# Altium PCB ESP32 WITH USB C PCB V111.PcbDoc (part 2 of 3)
Units mil, origin at the board's own origin, x right, y up, seen from the top; angles counter-clockwise.
Board outline 2735 x 1100 mil, 4 copper layers (L1, L2, L3, L4), stack 54.293 mil thick; 64 components, 73 nets, 299 pads, 176 vias.
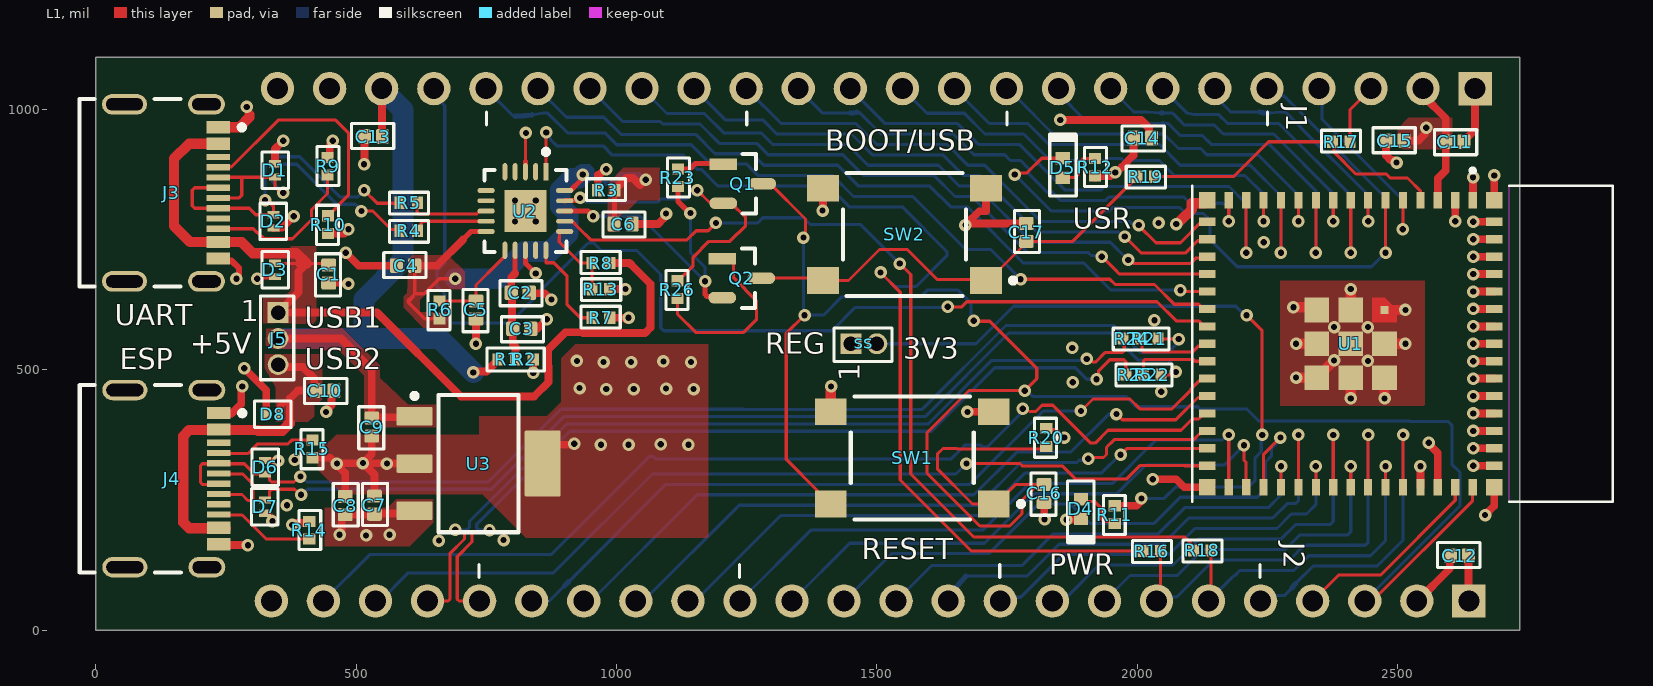
[diagram p0: L1 view]

## Via types
v1: diameter 24, hole 12, L1 to L4, tented both sides, 176 vias

## Nets (pads, with @x,y where several pads share a name; then routed paths per layer and width w, separated by ;. In a path a pad name is that pad's centre, name@x,y a point inside that pad or via, vN(x,y) a via of type N, cw(c..) or ccw(c..) an arc to the next point about the centre after c; other vN are vias at no path point) (continued)
+5V_VBUS1: C1.2 D3.1 J3.A4B9 J3.B4A9 J5.1 R8.2 | length 1786.1
  L1 w6: D3.1@344.61,704.19 390,704.19 ; 405,704.19 C1.2@444.14,704.19
  L1 w15: 390,704.19 405,704.19 389.18,688.37 389.18,649.18 J5.1@350,610 540,610 701,449 841.93,449 869.5,476.57 869.5,506.22 868.13,507.59 868.13,538.21 901.92,572 933.88,572 935.38,570.5 1054.71,570.5 1065,580.79 1065,665 1035,695 1025,705 R8.2@986.93,705 ; C1.2@444.14,704.19 C1.2@447,701.32
  L1 w20: J3.A4B9@235.59,934.41 J3.A4B9@235.12,934.41 179.41,934.41 150,905 150,776.72 181.28,745.43 J3.B4A9@235.12,745.43 279.87,745.43 301.3,724 305,724 385.19,724 405,704.19
+5V_VBUS2: C10.2 D8.1 J4.A4B9 J4.B4A9 J5.3 | length 706.7
  L1 w12: D8.1@352.8,415 353.69,415.89 353.69,430.21 360.71,437.24 372.36,437.24
  L1 w15: J5.3@350,510 354.78,505.22 397.78,505.22 419.47,483.53 419.47,463.21 C10.2@422.68,460 387.72,460 372.36,444.64 ; 372.36,397.67 372.36,437.24
  L1 w20: J4.B4A9@249.84,195.51 179.72,195.51 168,207.23 168,372.77 179.72,384.49 249.84,384.49 310.73,384.49 312.03,383.19 357.88,383.19 372.36,397.67
"+VCC FTDI": C2.2 C3.2 R1.2 R2.2 U2.12 | length 215
  L1 w6: C2.2@797.68,648 C2.2@799.18,646.5 ; C3.2@799.18,580.5 C3.2@800.68,579 ; 800.68,549.32 806.14,543.86
  L1 w10.01: 797.68,677.69 804.99,685.01 804.99,705.63 804.99,717.51 805.08,717.6 U2.12@805.08,718.06
  L1 w15: C2.2@797.68,648 797.68,677.69 804.99,685.01 ; C3.2@799.18,580.5 C2.2@799.18,646.5 ; 800.68,549.32 C3.2@800.68,579 ; R2.2@806.14,520 806.14,543.86
"BTN GPIO0": C17.2 Q2.3 R19.2 SW2.1 SW2.2 | length 858.2
  L1 w6: Q2.3@1278,676 1391.92,676 SW2.2@1396.5,671.42 1445.42,671.42 1505,731 1558.49,731 1616.35,673.15 1707.77,673.15 SW2.1@1709.5,671.42 1714.42,671.42 1777.83,734.83 1777.83,739.08 1785.43,746.68 C17.2@1787,746.68 1875.93,746.68 1999.07,869.82 R19.2@1999.07,871
CHIP_PU: C16.2 J2.3 Q1.3 R20.1 SW1.1 SW1.2 U1.45 | length 3996.6
  L1 w6: Q1.3@1279.85,857.4 1295.3,857.4 1363,789.7 1363,756 v1@1360,753 ; v1(1361,605) 1326,570 1326,327.92 1385.99,267.93 1385.99,263.01 1406.58,242.42 SW1.2@1411.5,242.42 ; v1(1686,594) 1686.79,593.21 1716.79,593.21 1807,503 1807,483 v1(1784,460) 1783.83,460.17 1676.99,460.17 1596.14,379.33 1596.14,301.57 1697.72,200 1755,200 1778.73,223.73 1778.73,249.22 1802.46,272.95 1813.95,272.95 C16.2@1821,280 1767,280 1729.42,242.42 SW1.1@1724.5,242.42 1683.58,242.42 1616.14,309.86 1616.14,338.28 1626.86,349 1653.41,349 1654.34,348.07 R20.1@1825,348.07 ; J2.3@2437,56 2451.61,56 2644.29,248.68 U1.45@2644.29,274.41
  L4 w6: v1@1359,605 v1(1359,754) ; v1(1361,605) 1397.39,605 1432.39,640 1583.74,640 1596.74,653 1656,653 1681,628 1681,599.86 v1@1686.86,594 ; v1(1784,460) 1787.79,460 1798.79,449 1978,449 1998,429 2116.18,429 2120.18,425 2210,425 2233,402 2521.66,402 2522.66,401 2597,401 2604.36,393.64 2604.36,318.67 2620,303.04 2620,239 J2.3@2437,56
CON1_USB_N: D1.2 J3.A7 J3.B7 R4.2 | length 586.4
  L1 w6.23: J3.A7@235.12,830.08 275.08,830.08 280,835 280,869.83 ; J3.B7@235.12,869.45 235.5,869.83 280,869.83 ; v1(360,840) 355,840 344,851 D1.2@344,870.2 343.62,869.83 280,869.83 ; v1(510,805) 532.14,805 567.82,769.33 581.82,769.33 R4.2@584.14,767
  L4 w6.23: v1(360,840) 339.23,860.77 339.23,884.23 350,895 385.58,895 462.69,817.89 497.86,817.89 510,805.74 v1(510,805)
CON1_USB_P: D2.2 J3.A6 J3.B6 R5.2 | length 662.1
  L1 w6.23: J3.A6@235.12,849.76 189.76,849.76 185,845 185,815 189.61,810.39 J3.B6@235.12,810.39 294.61,810.39 307.2,797.8 D2.2@341,797.8 341,814.03 329.03,826 v1(325,826) ; v1(515,845) 540,820 583.14,820 R5.2@584.14,821
  L4 w6.23: v1(325,826) 325,860.77 325,890.12 344.11,909.23 391.47,909.23 468.59,832.11 502.86,832.11 515,844.26 v1(515,845)
CON2_USB_N: D6.2 J4.A7 J4.B7 R21.1 | length 2189.9
  L1 w6.03: J4.A7@249.84,280.16 249.68,280 204.53,280 201,283.53 201,316 204.53,319.53 249.84,319.53 285.01,319.53 304.14,300.39 324.61,300.39 D6.2@325,300 329.92,300 333.8,296.13 333.8,288.05 337.33,284.51 380.48,284.51 390.97,295 v1(393,295) ; R21.1@2043,563 2047,559 v1(2080,559)
  L4 w6.03: v1(393,295) 395.03,295 405.52,284.51 753.44,284.51 893.09,424.16 1243.84,424.16 1243.95,424.05 1586.97,424.05 1747.93,585 1954.84,585 2006.81,533.03 2059.44,533.03 2068,541.59 2068,542.14 2080,554.14 v1(2080,559)
CON2_USB_P: D7.2 J4.A6 J4.B6 R22.1 | length 2137
  L1 w6.03: J4.B6@249.84,260.47 280.53,260.47 292,249 302,249 ; J4.A6@249.84,299.84 282.16,299.84 302,280 302,249 ; v1(394,260) 391.97,260 381.48,270.49 337.33,270.49 333.8,266.95 333.8,253.87 329.92,250 D7.2@325,250 324,249 302,249 ; R22.1@2046,491 2047,490 2063.14,490 2069.14,496 v1(2074,496)
  L4 w6.03: v1(394,260) 396.03,260 406.52,270.49 759.25,270.49 898.9,410.13 1238.03,410.13 1238.14,410.01 1592.78,410.01 1753.74,570.97 1949.03,570.97 2001,519 2059.44,519 2063.71,514.74 2063.71,511.16 2074,500.86 v1(2074,496)
"CON GPIO0": R17.2 S.3 | length 118.6
  L1 w6: R17.2@2408.93,938 2408.93,999.93 S.3@2449,1040